# Altium PCB Precision Rectifier CT.PcbDoc
Units mm, origin at the board's own origin, x right, y up, seen from the top; angles counter-clockwise.
Board outline 25 x 25 mm, 2 copper layers (Top Layer, Bottom Layer), stack 1.621 mm thick; 15 components, 10 nets, 38 pads, 12 vias.
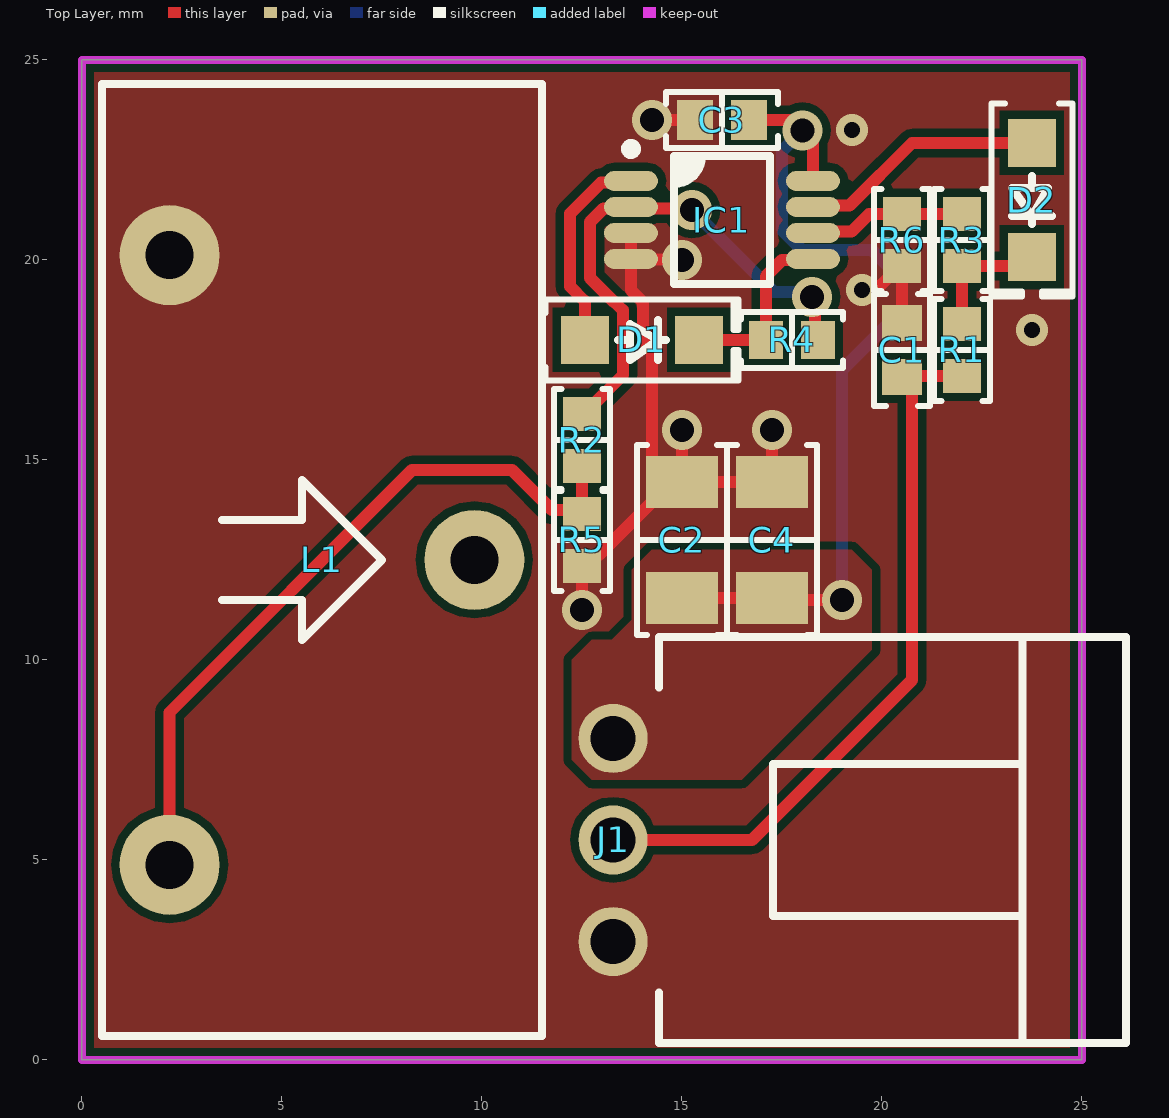
[diagram p0: Top Layer view]
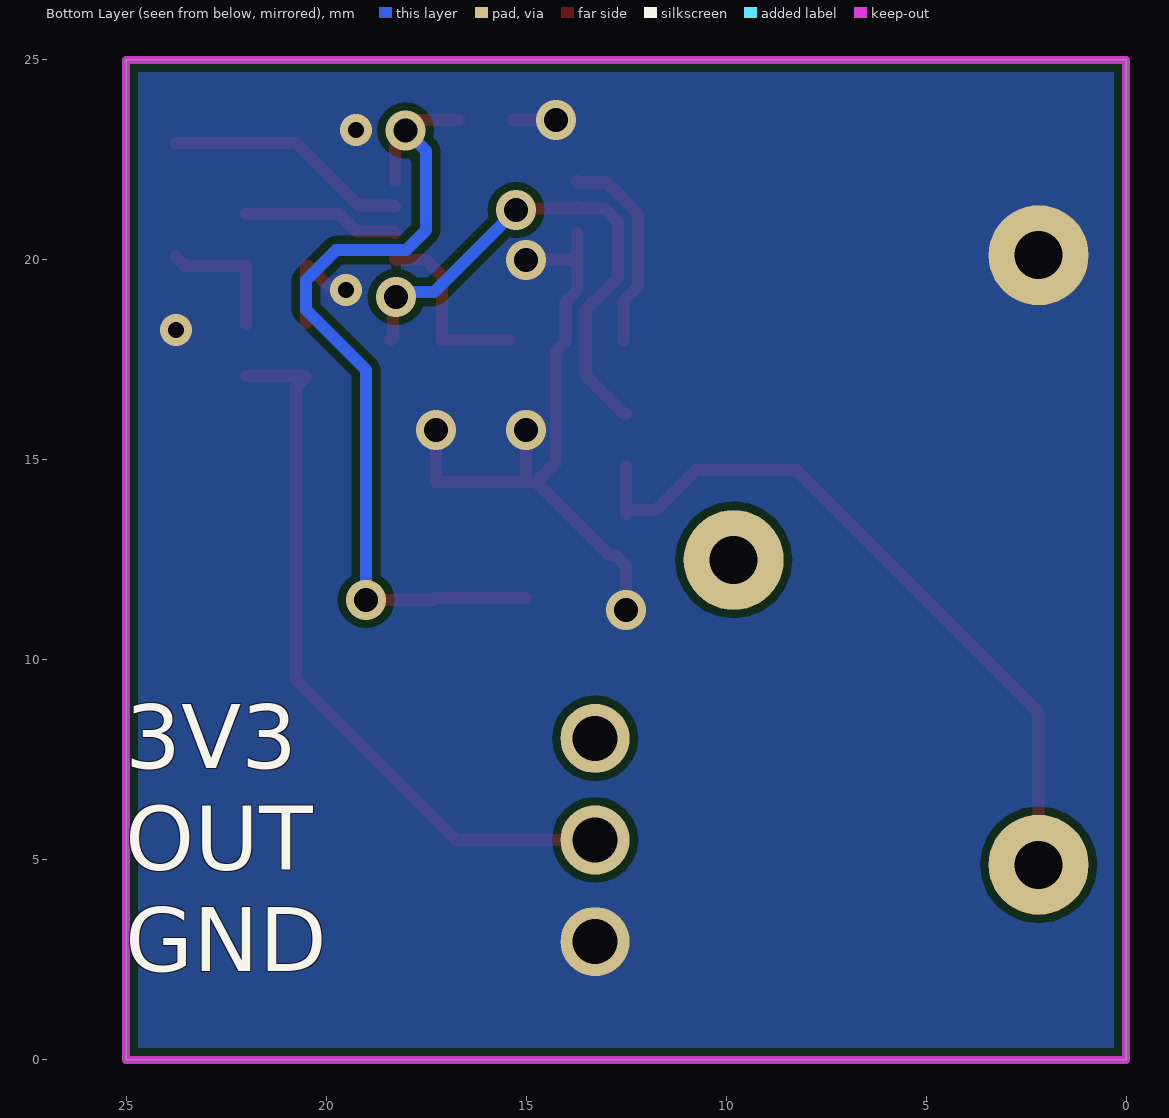
[diagram p1: Bottom Layer view, seen from below]
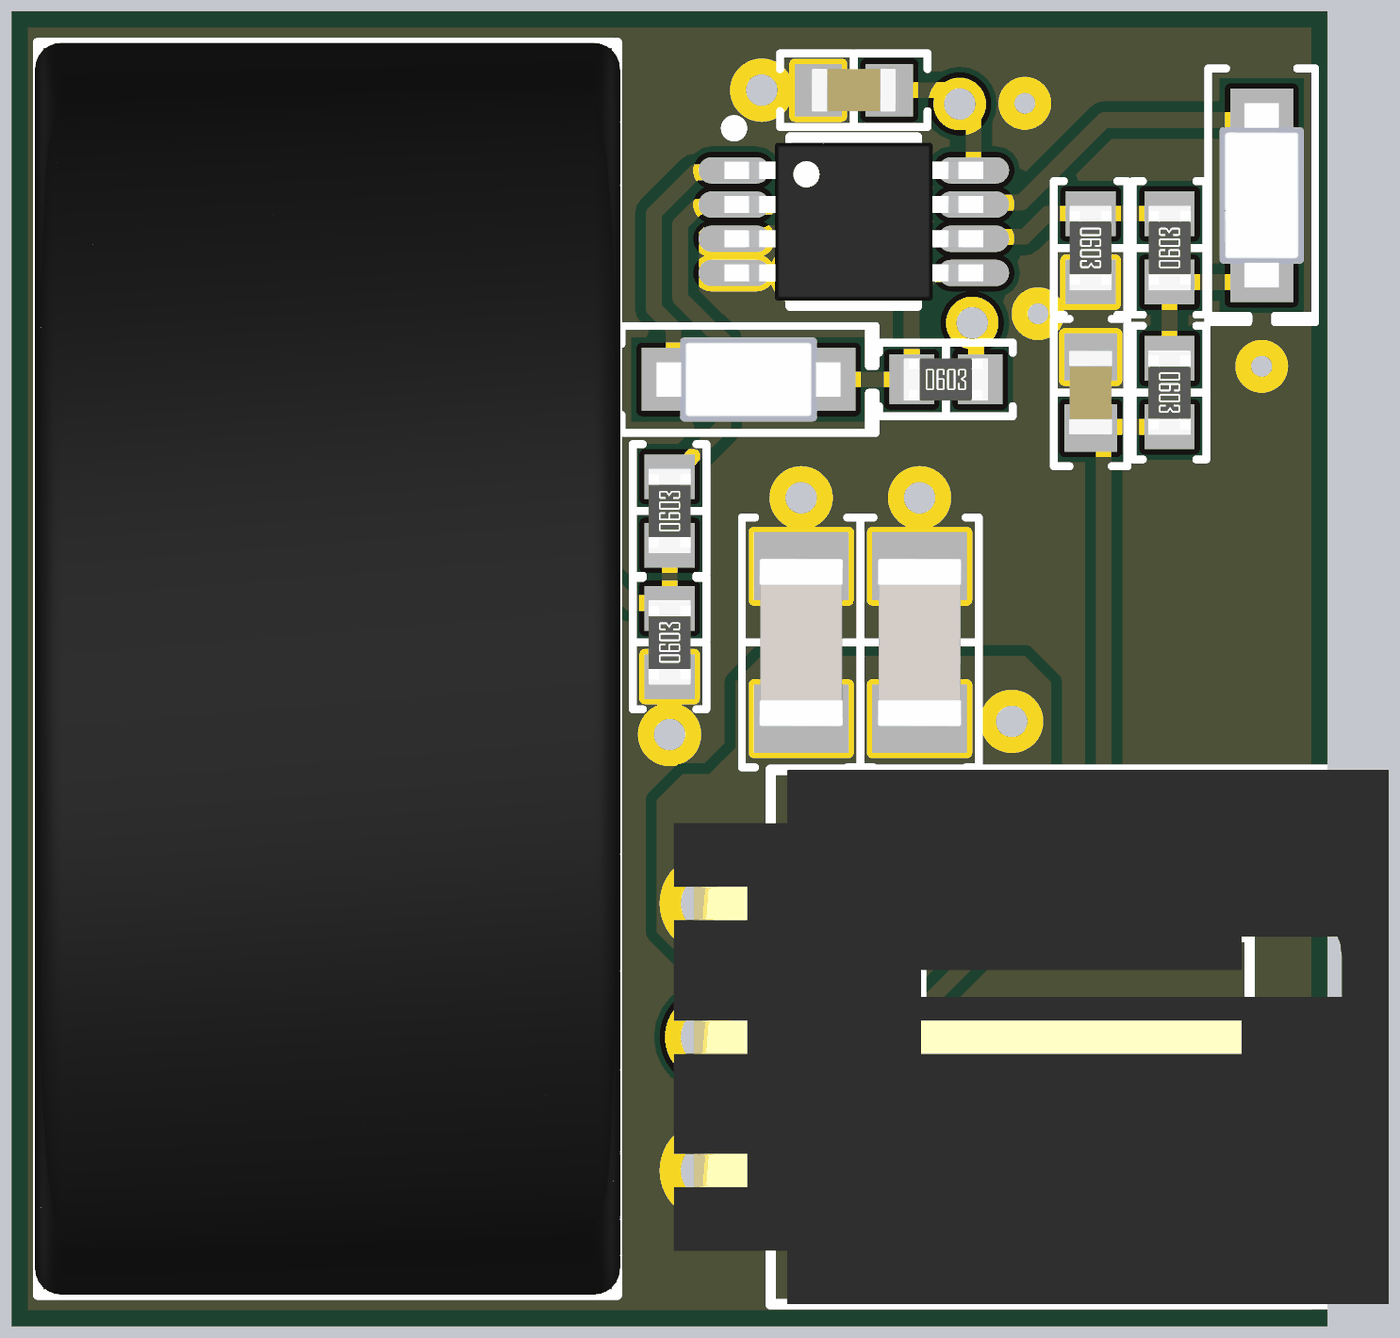
[diagram p2: 3D render of the assembled board from above, using the file's embedded part models]

## Layer stack, top to bottom
Top Solder: solder mask 0.0102, Solder Resist, Dk 3.5
Top Layer: signal copper 0.0356
Dielectric1: core 1.55, FR-4, Dk 4.8
Bottom Layer: signal copper 0.0356
Bottom Solder: solder mask 0.0102, Solder Resist, Dk 3.5

## Board outline
0,0 25,0 25,25 0,25

## Design rules (kind name [scope] priority, off if disabled: settings)
Clearance PadClearance [IsPad vs IsPad] p1: gap=0.2 ignorepadtopadclearanceinfootprint=FALSE except(0: Arc-Hole Track-Hole SMDPad-Hole THPad-Hole Via-Hole Fill-Hole Poly-Hole Region-Hole Text-Hole; 0.15: SMDPad-SMDPad)
Clearance [All] p2: gap=0.2 ignorepadtopadclearanceinfootprint=FALSE except(0: Arc-Hole Track-Hole SMDPad-Hole THPad-Hole Via-Hole Fill-Hole Poly-Hole Region-Hole Text-Hole)
HoleSize [All] p1: absolutevalues=TRUE maxlimit=6 minlimit=0.4 maxpercent=80.000 minpercent=20.000
HoleToHoleClearance [All] p1: gap=0.2 allowstackedmicrovias=TRUE
MinimumSolderMaskSliver [All] p1: minsoldermaskwidth=0
PolygonConnect ViaConnect [IsVia] p1: connectstyle=Direct reliefconductorwidth=0.254 reliefentries=4 polygonreliefangle="90 Angle" airgapwidth=0.254
PolygonConnect [All] p2: connectstyle=Direct reliefconductorwidth=0.3 reliefentries=4 polygonreliefangle="90 Angle" airgapwidth=0.254
RoutingVias [All] p1: holewidth=0.6 width=1 viastyle="Through Hole" minholewidth=0.4 minwidth=0.8 maxholewidth=5 maxwidth=6
SilkToSilkClearance [All] p1: silktosilkclearance=0
SilkToSolderMaskClearance SilkscreenOverComponentPads [IsPad] p1: minsilkscreentomaskgap=0.05 clearancetoexposedcopper=TRUE
SolderMaskExpansion "Via Tenting" [IsVia] p1: expansion=-2 istentingtop=FALSE
SolderMaskExpansion [All] p2: expansion=0.102 istentingtop=FALSE
Width [All] p1: maxlimit=2 minlimit=0.2 preferedwidth=0.4
25 further rules are at their usual default settings.

## Components (designator, comment, footprint, x,y, rotation, side; value= is the part's Value field where it differs from the comment)
C1 "0.1µF" "CAP 0603_1608" 20.5,17.75 r270 top
C2 "22µF" "CAP 1206_3216 - 1.0MM" 15,13 r270 top
C3 "0.1µF" "CAP 0603_1608" 16,23.5 r0 top
C4 "22µF" "CAP 1206_3216 - 1.0MM" 17.25,13 r270 top
D1 "NRVB120VLSFT1G" SOD123F 14,18 r0 top
D2 "NRVB120VLSFT1G" SOD123F 23.75,21.5 r270 top
IC1 "AD8542ARMZ-REEL" "ANALOG MSOP-8 RM-8" 16,21 r0 top
J1 "0705530002" "MOLEX SDA-70553-3PIN" 19.5,5.5 r270 top
L1 "AC1010" "TALEMA AC1010" 6,12.5 r90 top
R1 "1.8 kOhms" "RES 0603_1608" 22,17.75 r270 top
R2 "10 kOhms" "RES 0603_1608" 12.5,15.5 r90 top
R3 "10 kOhms" "RES 0603_1608" 22,20.5 r90 top
R4 "10 kOhms" "RES 0603_1608" 17.75,18 r0 top
R5 "100 Ohms" "RES 0603_1608" 12.5,13 r90 top
R6 "5 kOhms" "RES 0603_1608" 20.5,20.5 r270 top

## Footprints (in the part's own frame and the unit in brackets; to place one, negate y for a bottom-side part, rotate by r counter-clockwise, add the part's x,y. Pads: shape width x height; smd on the part's side, far side on the other; paste and mask are expansions set on the pad)
"ANALOG MSOP-8 RM-8" [mm]
  oval 1.35x0.5 smd: 1(-2.275,0.975) 2(-2.275,0.325) 3(-2.275,-0.325) 4(-2.275,-0.975) 5(2.275,-0.975) 6(2.275,-0.325) 7(2.275,0.325) 8(2.275,0.975)
  silkscreen extent -2.4,-1.6 1.2,1.9, body extent -2.46,-1.5 2.46,1.5, height 1.1
"CAP 0603_1608" [mm] "Chip Capacitor, 2-Leads, Body 1.60x0.80mm, IPC Medium Density"
  rect 0.9x1 smd: 1(-0.675,0) 2(0.675,0)
  silkscreen extent -1.4,-0.7 1.4,0.7, body extent -0.8,-0.41 0.8,0.41, height 0.82
"CAP 1206_3216 - 1.0MM" [mm] "Chip Capacitor, 2-Leads, Body 3.25x1.60mm, IPC Medium Density"
  rect 1.3x1.8 smd: 1(-1.45,0) 2(1.45,0)
  silkscreen extent -2.37,-1.12 2.37,1.12, body extent -1.6,-0.8 1.6,0.8, height 1
"MOLEX SDA-70553-3PIN" [mm] "SL Right Angle Header W/LAtch & Trip-Pegs 2.54mm Centres"
  round 1.73 hole 1.13: 1(-2.54,-6.223) 2(0,-6.223) 3(2.54,-6.223)
  silkscreen extent -5.08,-5.08 5.08,6.6, body extent -5.08,-6.92 5.08,6.67, height 6.98
"RES 0603_1608" [mm] "Chip Resistor, 2-Leads, Body 1.60x0.80mm, IPC Medium Density"
  rect 0.85x0.95 smd: 1(-0.65,0) 2(0.65,0)
  silkscreen extent -1.27,-0.7 1.27,0.7, body extent -0.8,-0.4 0.8,0.4, height 0.45
SOD123F [mm] "SODFL, 2-Leads, Body 1.60x3.50mm, IPC Medium Density"
  rect 1.2x1.2 smd: 1(-1.43,0) 2(1.43,0)
  silkscreen extent -2.41,-1.02 2.41,1.02, body extent -1.75,-0.8 1.75,0.8, height 1.1
"TALEMA AC1010" [mm] "CURRENT TRANSFORMER 23.8x23.8x11.12mm"
  round 2.5 hole 1.2: 1(7.62,3.81) 2(-7.62,3.81) 3(0,-3.81)
  silkscreen extent -11.9,-5.5 11.9,5.5, body extent -11.9,-5.56 11.9,5.56, height 24.3

## Part data
C1 C3: library part CS0603KRX7R7BB104, "CAP CER 0.1UF 16V X7R 0603", Device Package="0603 (1608 Metric)", Manufacturer=Yageo, Operating Temperature="-55°C ~ 125°C", Supplier Part Number 1=311-3560-1-ND, Temperature Coefficient=X7R, Tolerance=±10%, Voltage - Rated=16V, Applications="Boardflex Sensitive", Capacitance=0.1µF, ComponentLink1Description=Datasheet, ComponentLink1URL=http://www.yageo.com/NewPortal/yageodocoutput?fileName=/pdf/MLCC/UPY-ST_NPOX7R_16V-to-3KV_5.pdf, ComponentLink2Description="DigiKey Link", ComponentLink2URL=http://digikey.com/product-detail/en/yageo/CS0603KRX7R7BB104/311-3560-1-ND/7648487, Features="Soft Termination", LastUpdated="02/01/2020 00:02:08", Lifecycle Status=Active, Minimum Order=1, Mounting Type="Surface Mount, MLCC", Package / Case="0603 (1608 Metric)", Packaging=ReReel, Part Number=CS0603KRX7R7BB104, Part Status=Active, PartId=2286, Price=0.00, Series=CS, Size / Dimension="0.063\" L x 0.031\" W (1.60mm x 0.80mm)", Supplier 1=DigiKey, Thickness (Max)="0.037\" (0.95mm)"
C2 C4: library part CL31A226MOCLNNC, "CAP CER 22UF 16V X5R 1206", Device Package="1206 (3216 Metric)", Manufacturer="Samsung Electro-Mechanics", Operating Temperature="-55°C ~ 85°C", Supplier Part Number 1=1276-2728-1-ND, Temperature Coefficient=X5R, Tolerance=±20%, Voltage - Rated=16V, Applications="General Purpose", Capacitance=22µF, ComponentLink1Description=Datasheet, ComponentLink1URL=http://www.samsungsem.com/kr/support/product-search/mlcc/CL31A226MOCLNNC.jsp, ComponentLink2Description="DigiKey Link", ComponentLink2URL=http://digikey.com/product-detail/en/samsung-electro-mechanics/CL31A226MOCLNNC/1276-2728-1-ND/3890814, Features="Low Profile", LastUpdated="13/01/2020 00:03:54", Lifecycle Status=Active, Minimum Order=1, Mounting Type="Surface Mount, MLCC", Package / Case="1206 (3216 Metric)", Packaging=TapeAndReel, Part Number=CL31A226MOCLNNC, Part Status=Active, PartId=19106, Price=0.08, Series=CL, Size / Dimension="0.126\" L x 0.063\" W (3.20mm x 1.60mm)", Supplier 1=DigiKey, Thickness (Max)="0.037\" (0.95mm)"
D1 D2: "DIODE SCHOTTKY 20V 1A SOD123", Current - Average Rectified (Io)=1A, Current - Reverse Leakage @ Vr="15mA @ 20V", Device Package=SOD-123F, Manufacturer="ON Semiconductor", Operating Temperature - Junction="-65°C ~ 125°C", Supplier Device Package=SOD-123FL, Supplier Part Number 1=NRVB120VLSFT1GOSCT-ND, Voltage - DC Reverse (Vr) (Max)=20V, Voltage - Forward (Vf) (Max) @ If="300mV @ 1A", ComponentLink1Description=Datasheet, ComponentLink1URL=http://www.onsemi.com/pub/Collateral/MBR120VLSFT1-D.PDF, ComponentLink2Description="DigiKey Link", ComponentLink2URL=http://digikey.com/product-detail/en/on-semiconductor/NRVB120VLSFT1G/NRVB120VLSFT1GOSCT-ND/8538727, Diode Type=Schottky, LastUpdated="02/01/2020 00:13:05", Lifecycle Status=Active, Minimum Order=1, Mounting Type="Surface Mount", Package / Case=SOD-123F, Packaging=ReReel, Part Number=NRVB120VLSFT1G, Part Status=Active, PartId=2453, Price=0.00, Series="Automotive, AEC-Q101", Speed="Fast Recovery =< 500ns, > 200mA (Io)", Supplier 1=DigiKey
IC1: "IC OPAMP GP 2 CIRCUIT 8MSOP", Current - Input Bias=4pA, Current - Output / Channel=30mA, Current - Supply=45µA, Device Package="8-TSSOP, 8-MSOP (0.118\", 3.00mm Width)", Manufacturer="Analog Devices Inc.", Operating Temperature="-40°C ~ 125°C", Supplier Device Package=8-MSOP, Supplier Part Number 1=AD8542ARMZ-REELCT-ND, Voltage - Input Offset=1mV, Voltage - Supply, Single/Dual (±)="2.7V ~ 5.5V", Amplifier Type="General Purpose", ComponentLink1Description=Datasheet, ComponentLink1URL=https://www.analog.com/media/en/technical-documentation/data-sheets/AD8541_8542_8544.pdf, ComponentLink2Description="DigiKey Link", ComponentLink2URL=http://digikey.com/product-detail/en/analog-devices-inc/AD8542ARMZ-REEL/AD8542ARMZ-REELCT-ND/1957825, Gain Bandwidth Product=1MHz, LastUpdated="08/01/2020 23:28:44", Lifecycle Status=Active, Minimum Order=1, Mounting Type="Surface Mount", Number of Circuits=2, Output Type=Rail-to-Rail, Package / Case="8-TSSOP, 8-MSOP (0.118\", 3.00mm Width)", Packaging=ReReel, Part Number=AD8542ARMZ-REEL, Part Status=Active, PartId=7, Price=0.00, Series=-, Slew Rate=0.92V/µs, Supplier 1=DigiKey
J1: "CONN HEADER R/A 3POS 2.54MM", Insulation Color=Black, Manufacturer=Molex, Material Flammability Rating="UL94 V-0", Operating Temperature="-40°C ~ 105°C", Supplier Part Number 1=WM4901-ND, Voltage Rating=250V, ComponentLink1Description=Datasheet, ComponentLink1URL=https://www.molex.com/pdm_docs/sd/705530002_sd.pdf, ComponentLink2Description="DigiKey Link", ComponentLink2URL=http://digikey.com/product-detail/en/molex/0705530002/WM4901-ND/114955, Connector Type=Header, Contact Finish - Mating=Gold, Contact Finish - Post=Tin, Contact Finish Thickness - Mating="15.0µin (0.38µm)", Contact Length - Mating="0.240\" (6.10mm)", Contact Length - Post="0.130\" (3.30mm)", Contact Material="Phosphor Bronze", Contact Shape=Square, Contact Type="Male Pin", Fastening Type="Latch Holder", Insulation Height="0.215\" (5.45mm)", Insulation Material="Polyester, Glass Filled", LastUpdated="12/01/2020 23:55:56", Lifecycle Status=Active, Minimum Order=1, Mounting Type="Through Hole, Right Angle", Number of Positions=3, Number of Positions Loaded=All, Number of Rows=1, Packaging=Tube, Part Number=0705530002, Part Status=Active, PartId=86, Pitch - Mating="0.100\" (2.54mm)", Price=1.02, Series="SL 70553", Shrouding="Shrouded - 4 Wall", Style="Board to Cable/Wire", Supplier 1=DigiKey, Termination=Solder
L1: "CURR SENSE XFMR 10A T/H", Current Rating (Amps)=10A, Current Ratio=1000:1, DC Resistance (DCR)=41.8Ohm, Frequency Range=50/60Hz, Manufacturer="Talema Group LLC", Supplier Part Number 1=1295-1102-ND, ComponentLink1Description=Datasheet, ComponentLink1URL=http://www.talema.com/uploads/documents/product-datasheets/AC%20Series.pdf, ComponentLink2Description="DigiKey Link", ComponentLink2URL=http://digikey.com/product-detail/en/talema-group-llc/AC1010/1295-1102-ND/3881333, Height - Seated (Max)="0.937\" (23.80mm)", LastUpdated="07/01/2020 18:42:16", Lifecycle Status=Active, Minimum Order=1, Mounting Type="Through Hole", Packaging=Tube, Part Number=AC1010, Part Status=Active, Price=5.81, Series=AC, Size / Dimension="0.937\" L x 0.438\" W (23.80mm x 11.12mm)", Supplier 1=DigiKey, Termination Style="PC Pin", Type="Non-Invasive (Solid Core)"
R1: library part RMCF0603JT1K80, "RES 1.8K OHM 5% 1/10W 0603", Device Package="0603 (1608 Metric)", Manufacturer="Stackpole Electronics Inc", Operating Temperature="-55°C ~ 155°C", Power (Watts)="0.1W, 1/10W", Ratings=AEC-Q200, Supplier Device Package=0603, Supplier Part Number 1=RMCF0603JT1K80CT-ND, Temperature Coefficient=±200ppm/°C, Tolerance=±5%, ComponentLink1Description=Datasheet, ComponentLink1URL=https://www.seielect.com/catalog/sei-rmcf_rmcp.pdf, ComponentLink2Description="DigiKey Link", ComponentLink2URL=http://digikey.com/product-detail/en/stackpole-electronics-inc/RMCF0603JT1K80/RMCF0603JT1K80CT-ND/1943176, Composition="Thick Film", Features="Automotive AEC-Q200", Height - Seated (Max)="0.022\" (0.55mm)", LastUpdated="02/01/2020 00:07:01", Lifecycle Status=Active, Minimum Order=1, Number of Terminations=2, Package / Case="0603 (1608 Metric)", Packaging=TapeAndReel, Part Number=RMCF0603JT1K80, Part Status=Active, PartId=5907, Price=0.00, Resistance="1.8 kOhms", Series=RMCF, Size / Dimension="0.061\" L x 0.031\" W (1.55mm x 0.80mm)", Supplier 1=DigiKey
R2 R3 R4: library part ERA-3AEB103V, "RES SMD 10K OHM 0.1% 1/10W 0603", Device Package="0603 (1608 Metric)", Manufacturer="Panasonic Electronic Components", Operating Temperature="-55°C ~ 155°C", Power (Watts)="0.1W, 1/10W", Ratings=AEC-Q200, Supplier Device Package=0603, Supplier Part Number 1=P10KDBCT-ND, Temperature Coefficient=±25ppm/°C, Tolerance=±0.1%, ComponentLink1Description=Datasheet, ComponentLink1URL=https://industrial.panasonic.com/cdbs/www-data/pdf/RDM0000/AOA0000C307.pdf, ComponentLink2Description="DigiKey Link", ComponentLink2URL=http://digikey.com/product-detail/en/panasonic-electronic-components/ERA-3AEB103V/P10KDBCT-ND/1466076, Composition="Thin Film", Features="Automotive AEC-Q200", Height - Seated (Max)="0.022\" (0.55mm)", LastUpdated="02/01/2020 00:07:02", Lifecycle Status=Active, Minimum Order=1, Number of Terminations=2, Package / Case="0603 (1608 Metric)", Packaging=ReReel, Part Number=ERA-3AEB103V, Part Status=Active, PartId=5506, Price=0.00, Resistance="10 kOhms", Series=ERA-3A, Size / Dimension="0.063\" L x 0.031\" W (1.60mm x 0.80mm)", Supplier 1=DigiKey
R5: library part ESR03EZPJ101, "RES SMD 100 OHM 5% 1/4W 0603", Device Package="0603 (1608 Metric)", Manufacturer="Rohm Semiconductor", Operating Temperature="-55°C ~ 155°C", Power (Watts)="0.25W, 1/4W", Ratings=AEC-Q200, Supplier Device Package=0603, Supplier Part Number 1=RHM100DCT-ND, Temperature Coefficient=±200ppm/°C, Tolerance=±5%, ComponentLink1Description=Datasheet, ComponentLink1URL=https://www.rohm.com/datasheet/ESR01MZPF/esr-e, ComponentLink2Description="DigiKey Link", ComponentLink2URL=http://digikey.com/product-detail/en/rohm-semiconductor/ESR03EZPJ101/RHM100DCT-ND/1983776, Composition="Thick Film", Features="Automotive AEC-Q200, Pulse Withstanding", Height - Seated (Max)="0.022\" (0.55mm)", LastUpdated="02/01/2020 00:07:02", Lifecycle Status=Active, Minimum Order=1, Number of Terminations=2, Package / Case="0603 (1608 Metric)", Packaging=ReReel, Part Number=ESR03EZPJ101, Part Status=Active, PartId=5450, Price=0.00, Resistance="100 Ohms", Series=ESR, Size / Dimension="0.063\" L x 0.031\" W (1.60mm x 0.80mm)", Supplier 1=DigiKey
R6: library part PNM0603E5001BST5, "RES SMD 5K OHM 0.1% 0.15W 0603", Device Package="0603 (1608 Metric)", Manufacturer="Vishay Thin Film", Operating Temperature="-55°C ~ 155°C", Power (Watts)=0.15W, Supplier Device Package=0603, Supplier Part Number 1=PNM0603-5.0KBCT-ND, Temperature Coefficient=±25ppm/°C, Tolerance=±0.1%, ComponentLink1Description=Datasheet, ComponentLink1URL=http://www.vishay.com/docs/60057/pnm.pdf, ComponentLink2Description="DigiKey Link", ComponentLink2URL=http://digikey.com/product-detail/en/vishay-thin-film/PNM0603E5001BST5/PNM0603-5.0KBCT-ND/2120383, Composition="Thin Film", Features="Anti-Sulfur, Moisture Resistant, Non-Inductive, Non-Magnetic", Height - Seated (Max)="0.020\" (0.51mm)", LastUpdated="02/01/2020 00:06:54", Lifecycle Status=Active, Minimum Order=1, Number of Terminations=2, Package / Case="0603 (1608 Metric)", Packaging=ReReel, Part Number=PNM0603E5001BST5, Part Status=Active, PartId=11960, Price=0.00, Resistance="5 kOhms", Series=PNM, Size / Dimension="0.064\" L x 0.032\" W (1.63mm x 0.81mm)", Supplier 1=DigiKey

## Via types
v1: diameter 1, hole 0.6, Top Layer to Bottom Layer, 9 vias
v2: diameter 0.8, hole 0.4, Top Layer to Bottom Layer, 3 vias

## Nets (pads, with @x,y where several pads share a name; then routed paths per layer and width w, separated by ;. In a path a pad name is that pad's centre, name@x,y a point inside that pad or via, vN(x,y) a via of type N, cw(c..) or ccw(c..) an arc to the next point about the centre after c; other vN are vias at no path point)
3V3: C2.2 C3.2 C4.2 IC1.8 J1.1 | length 21.7
  Top Layer w0.3: C2.2 C4.2 17.3,11.5 v1(19,11.5) ; C3.2 17.75,23.5 18.275,22.975 IC1.8
  Bottom Layer w0.3: v1(18.013,23.238) 17.5,22.725 17.5,20.75 18,20.25 19.75,20.25 20.5,19.5 20.5,18.75 19,17.25 v1(19,11.5)
ADC_OUT: C1.2 J1.2 R1.2 | length 18.3
  Top Layer w0.3: J1.2 16.75,5.5 20.75,9.5 20.75,16.825 C1.2 20.525,17.1 R1.2
GND: C1.1 C2.1 C3.1 C4.1 IC1.3 IC1.4 J1.3 L1.1 R5.1 R6.2 | length 21
  Top Layer w0.3: v1(12.5,11.25) R5.1 12.775,12.625 12.925,12.625 C2.1@14.75,14.45 ; IC1.3 IC1.4 ; v1(14.25,23.5) C3.1 ; v1(15,15.75) C2.1 ; v1(15,20) 14.988,20.012 13.738,20.012 IC1.4 ; v1(17.25,15.75) C4.1 C2.1 ; v2(19.5,19.25) 19.596,19.346 19.946,19.346 20.45,19.85 R6.2 C1.1 ; IC1.4 13.725,19.247 14.02,18.952 14.02,17.957 14.25,17.727 14.25,14.95 C2.1@14.75,14.45 ; C2.1@14.75,14.45 C2.1
  other v2: 23.75,18.25 19.25,23.25
NetD1_1: D1.1 IC1.1 | length 5.2
  Top Layer w0.3: D1.1 12.57,18.973 12.2,19.343 12.2,21.157 12.98,21.937 13.687,21.937 IC1.1
NetD1_2: D1.2 IC1.5 R4.1 | length 4.6
  Top Layer w0.3: D1.2 R4.1 17.1,19.6 17.5,20 18.25,20 IC1.5
NetD2_1: D2.1 IC1.7 | length 6.1
  Top Layer w0.3: IC1.7 18.313,21.363 19.187,21.363 20.754,22.93 D2.1
NetD2_2: D2.2 R1.1 R3.1 | length 3.3
  Top Layer w0.3: R1.1 R3.1 23.53,19.85 D2.2
NetIC1_2: IC1.2 R2.2 R4.2 | length 13.4
  Top Layer w0.3: R2.2 12.55,16.15 13.52,17.12 13.52,18.745 13.315,18.95 13.3,18.95 13.251,18.999 12.7,19.55 12.7,20.95 13.037,21.287 13.687,21.287 IC1.2 13.762,21.287 15.213,21.287 v1(15.25,21.25) ; v1(18.25,19.075) 18.325,19 18.325,18.075 R4.2
  Bottom Layer w0.3: v1(15.25,21.25) 17.3,19.2 18.125,19.2 v1(18.25,19.075)
NetIC1_6: IC1.6 R3.2 R6.1 | length 3.9
  Top Layer w0.3: IC1.6 18.313,20.713 19.244,20.713 19.681,21.15 R6.1 R3.2
NetL1_2: L1.2 R2.1 R5.2 | length 18.3
  Top Layer w0.3: L1.2 2.19,8.69 8.25,14.75 10.75,14.75 11.75,13.75 12.4,13.75 R5.2 R2.1
pads on no net: L1.3

## Polygon pours and split planes (outlines as drawn)
GND on Top Layer "GND_L01_P002" (solid, remove dead copper, pour order 2): 0,25 0,0 25,0 25,25
3V3 on Top Layer "3V3_L01_P000" (solid, remove dead copper, pour order 0): 12.75,7 12.25,7.5 12.25,10 12.75,10.5 13.25,10.5 13.75,11 13.75,12.25 14.25,12.75 19.25,12.75 19.75,12.25 19.75,10.25 16.5,7
GND on Bottom Layer "GND_L02_P001" (solid, remove dead copper, pour order 1): 0,25 0,0 25,0 25,25

## Keep-outs
Keep-Out Layer:
  the board outline again, w0.2

## Silkscreen, mask and mechanical layers (free items; w line width, h text height)
Bottom Overlay:
  text "3V3" at 25.027,6.77 h2.75
  text "OUT" at 25.027,4.23 h2.75
  text "GND" at 25.027,1.69 h2.75